# Altium PCB power_protection_board.PcbDoc
Units mm, origin at the board's own origin, x right, y up, seen from the top; angles counter-clockwise.
Board outline 16 x 10.5 mm, 2 copper layers (Top Layer, Bottom Layer); 15 components, 10 nets, 45 pads, 98 vias.
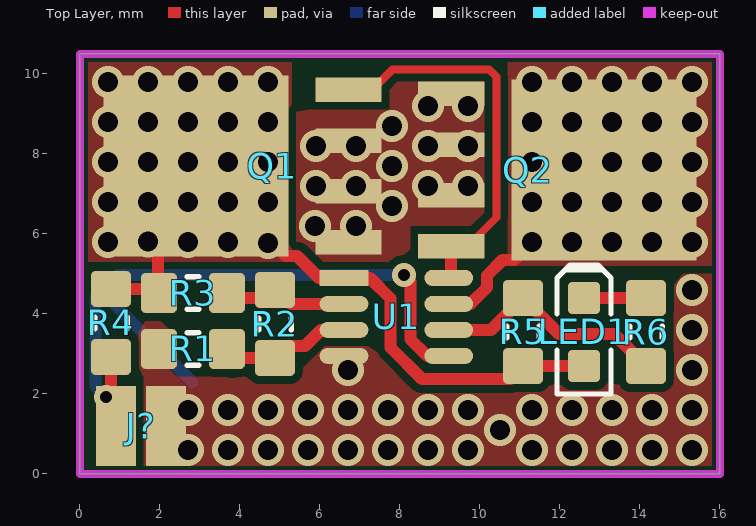
[diagram p0: Top Layer view]
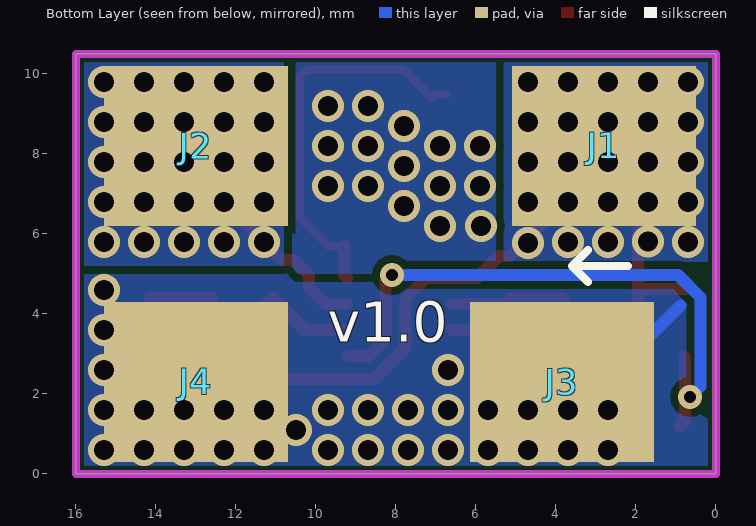
[diagram p1: Bottom Layer view, seen from below]
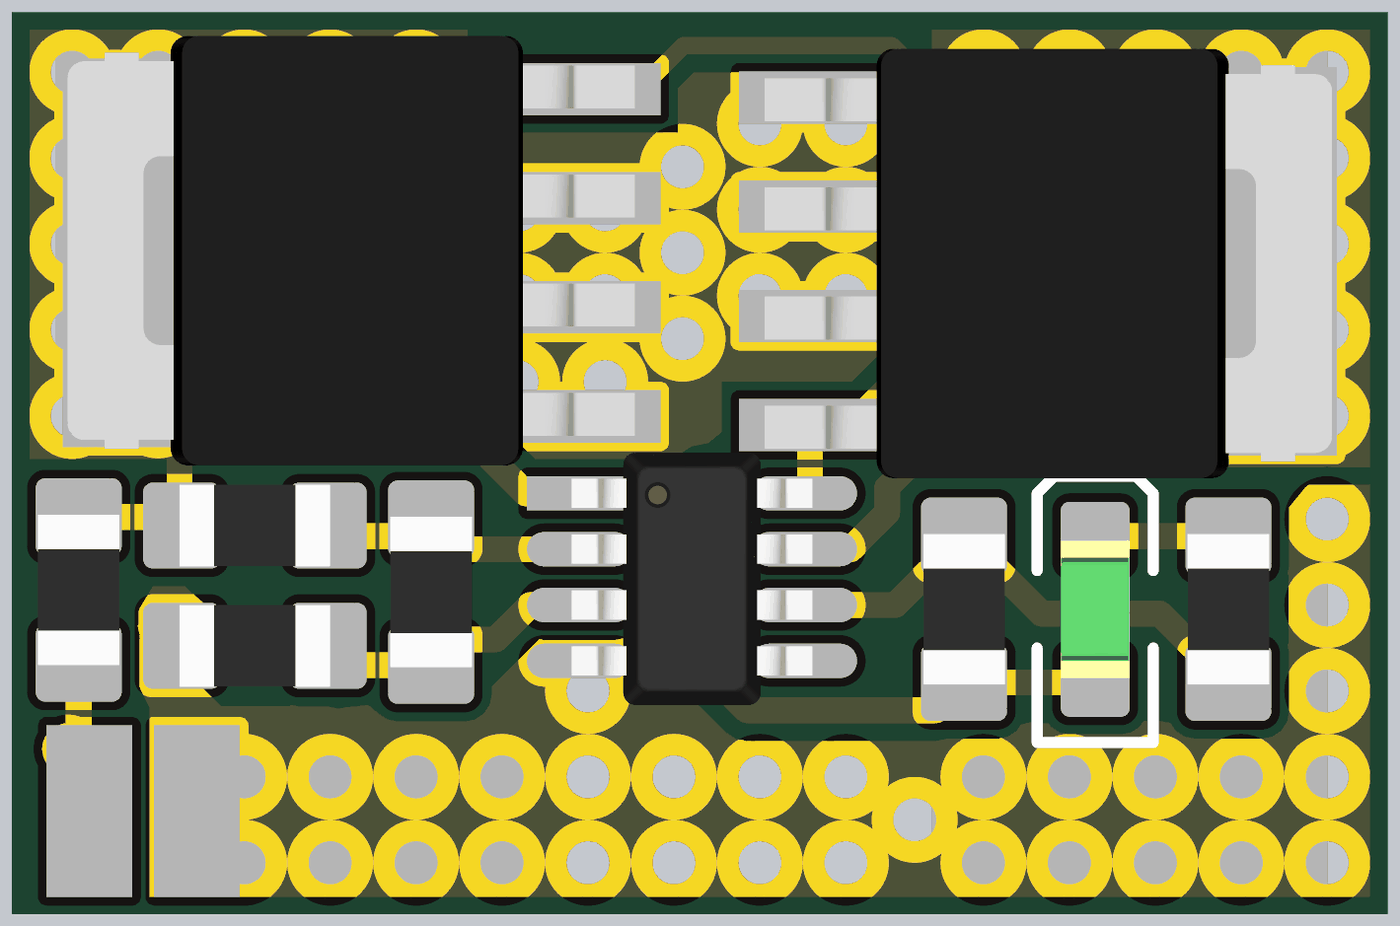
[diagram p2: 3D render of the assembled board from above, using the file's embedded part models]

## Layer stack, top to bottom
Top Solder: solder mask 0.0102, Solder Resist, Dk 3.5
Top Layer: signal copper 0.0356
Dielectric 1: dielectric 0.32, FR-4, Dk 4.8
Bottom Layer: signal copper 0.0356
Bottom Solder: solder mask 0.0102, Solder Resist, Dk 3.5

## Board outline
0,0 16,0 16,10.5 0,10.5

## Design rules (kind name [scope] priority, off if disabled: settings)
Clearance ClearanceKeepOut [All vs OnLayer('Keep-Out Layer')] p1: gap=0.1 ignorepadtopadclearanceinfootprint=FALSE
Clearance [All] p2: gap=0.2 ignorepadtopadclearanceinfootprint=FALSE
ComponentClearance [All] p1: gap=0.2 collisioncheckmode=3 verticalgap=0.2 showdistances=FALSE
PolygonConnect [All] p1: connectstyle=Direct reliefconductorwidth=0.254 reliefentries=4 polygonreliefangle="90 Angle" airgapwidth=0.254
RoomDefinition power_protection_board [InComponentClass('power_protection_board')] p1: confinementstyle=ConfineIn formatcopy=TRUE lockcomponents=FALSE outline 0,-1 52.2,-1 52.2,29.4 0,29.4
RoutingVias [All] p1: holewidth=0.5 width=1 viastyle="Through Hole" minholewidth=0.3 minwidth=0.6 maxholewidth=3 maxwidth=5
SolderMaskExpansion SolderMaskExpansionVia [IsVia And (Not IsTestpoint)] p1: expansion=-5
SolderMaskExpansion [All] p2: expansion=0.1
Width [All] p1: maxlimit=10 minlimit=0.2 preferedwidth=0.3
29 further rules are at their usual default settings.

## Components (designator, comment, footprint, x,y, rotation, side; value= is the part's Value field where it differs from the comment)
J1 "V_IN" POWER-PAD 2.8,8.2 r270 bottom
J2 "V_OUT" POWER-PAD 13,8.2 r270 bottom locked
J3 "GND_IN" POWER-PAD 3.85,2.3 r270 bottom
J4 "GND_OUT" POWER-PAD 13,2.3 r270 bottom
J? "SWITCH" PADS-2-1020 0.9,1.2 r0 top
LED1 "" LED-0603-GREEN 12.6,3.55 r90 top
Q1 "MOSFET-N" SOT669 4.068,7.7 r180 top
Q2 "MOSFET-N" SOT669 11.932,7.6 r0 top
R1 "196k" RESC1608X55N 2.825,3.125 r0 top value=1K5
R2 "105k" RESC1608X55N 4.875,3.75 r90 top value=1K5
R3 "7.5M" RESC1608X55N 2.825,4.525 r180 top value=1K5
R4 "100k" RESC1608X55N 0.775,3.775 r90 top value=1K5
R5 "10k" RESC1608X55N 11.075,3.55 r270 top value=1K5
R6 "10k" RESC1608X55N 14.15,3.55 r90 top value=1K5
U1 "LTC4365" SOT23-8 6.6,4.9 r0 top

## Footprints (in the part's own frame and the unit in brackets; to place one, negate y for a bottom-side part, rotate by r counter-clockwise, add the part's x,y. Pads: shape width x height; smd on the part's side, far side on the other; paste and mask are expansions set on the pad)
LED-0603-GREEN [mm]
  round 0.254 on Mech15: 0(0,0)
  rrect25% 0.8x0.8 smd: A(-0.85,0) K(0.85,0)
  Top Layer pour cut-out: -0.5,0.5 0.5,0.5 0.5,-0.5 -0.5,-0.5
  silkscreen extent -1.55,-0.67 1.68,0.67, body extent -0.8,-0.4 0.8,0.4, height 0.75
PADS-2-1020 [mm]
  rect 1x2 smd: 1(0,0) 2(1.25,0)
POWER-PAD [mm]
  rect 4x4.6 smd: 1(0,0)
RESC1608X55N [mm] "Chip Resistor, Body 1.6x0.8mm, EIA 0603, IPC Medium Density"
  round 0.254 on Mech15: 0(0,0)
  rrect25% 0.9x1 smd: 1(-0.85,0) 2(0.85,0)
  Top Layer pour cut-out: -0.6,0.5 -0.4,0.7 0.4,0.7 0.6,0.5 0.6,-0.5 0.4,-0.7 -0.4,-0.7 -0.6,-0.5
  silkscreen extent -0.15,-0.41 0.15,0.41, body extent -0.87,-0.47 0.88,0.48, height 0.54
SOT23-8 [mm]
  rect 1.22x0.4 smd: 1(0,0)
  oval 1.22x0.4 smd: 2(0,-0.65) 3(0,-1.3) 4(0,-1.95) 5(2.62,-1.95) 6(2.62,-1.3) 7(2.62,-0.65) 8(2.62,0)
  body extent -0.09,-2.46 2.71,0.48, height 1.2
SOT669 [mil]
  rect 182x178 smd: D(46,0)
  rect 65x24 smd: G(-104.33,-75) S(-104.33,75) S(-104.33,-25) S(-104.33,25)
  body extent -125,-99 135,97, height 43

## Part data
J1 J2 J3 J4: library part HEADER-1
J?: library part HEADER-2
LED1: library part LED_SMD_Green_0603_525nm_350mcd, "LED 0603 SMD Green 525nm 350mcd 20mA", Color=Green, Current - Test=20mA, Manufacturer 1=Kingbright, Manufacturer 2="Kingbright Company LLC", Manufacturer Part Number 1=APT1608ZGCK, Manufacturer Part Number 2=APT1608-WAP24, Package / Case="0603 (1608 metric)", Ratings="200mcd min; 350 mcd typ @ 20mA", Supplier Part Number 1=604-APT1608ZGCK, Voltage - Forward (Vf) @ 10mA=3.1V, Voltage - Forward (Vf) @ 20mA=3.3V, ComponentLink1Description=http://www.mouser.com/ds/2/216/APT1608ZGCK-262051.pdf, ComponentLink1URL=http://www.mouser.com/ds/2/216/APT1608ZGCK-262051.pdf, ComponentLink2Description="APT1608-WAP24 Datasheet", ComponentLink2URL="\\SVFI2\PBLShare\Eng\Electrical Engineering\Hardware\Altium\Libraries and Templates\Unreleased Components\Part Number Request 2013-10-02\APT1608-WAP24(Ver.1B).pdf", Lens Style/Size="Rectangle with Flat Top, 1.2mm x 0.8mm", Material=InGaN, SCDType=source, Supplier 1=Mouser, Viewing Angle=120°
R1 R2 R3 R4 R5 R6: library part RES_1K5_0603_5%, "Resistor SMD chip 1.5k Ohm 0.1W 5% 0603", Manufacturer 1=Yageo, Manufacturer Part Number 1=RC0603JR-071K5L, Package / Case="0603 (1608 metric)", Ratings="1/10 W", Supplier Part Number 1=311-1.5KGRCT-ND, Tolerance=±5%, Material="thick film", SCDType=spec, Supplier 1=Digi-Key
Q1 Q2: PROD_ID=IC-08089

## Via types
v1: diameter 0.8, hole 0.5, Top Layer to Bottom Layer, 96 vias
v2: diameter 0.6, hole 0.3, Top Layer to Bottom Layer, 2 vias

## Nets (pads, with @x,y where several pads share a name; then routed paths per layer and width w, separated by ;. In a path a pad name is that pad's centre, name@x,y a point inside that pad or via, vN(x,y) a via of type N, cw(c..) or ccw(c..) an arc to the next point about the centre after c; other vN are vias at no path point)
GATE: Q1.G Q2.G U1.8 | length 9.9
  Top Layer w0.2: Q1.G@6.718,9.505 7,9.505 7.103,9.403 7.81,10.11 10.231,10.11 10.407,9.934 10.407,6.407 9.695,5.695 Q2.G
  Top Layer w0.3: U1.8 9.282,4.962 Q2.G
GND: J3.1 J4.1 J?.2 R1.1 U1.4 | length 2.7
  Bottom Layer w0.3: 0.891,4.209 J3.1@2.8,2.3
  other v1: 2.7,0.6 3.7,0.6 4.7,0.6 5.7,0.6 6.7,0.6 7.7,0.6 8.7,0.6 9.7,0.6 11.3,0.6 12.3,0.6 13.3,0.6 14.3,0.6 15.3,0.6 10.5,1.1 2.7,1.6 3.7,1.6 4.7,1.6 5.7,1.6 6.7,1.6 7.7,1.6 8.7,1.6 9.7,1.6 11.3,1.6 12.3,1.6 13.3,1.6 14.3,1.6 15.3,1.6 6.7,2.6 15.3,2.6 15.3,3.6 15.3,4.6
NetLED1_K: LED1.K R6.2 | length 1.6
  Top Layer w0.3: LED1.K R6.2
NetQ1_S: Q1.S Q2.S
  other v1: 5.875,6.2 6.9,6.2 7.8,6.7 5.9,7.2 6.9,7.2 8.7,7.2 9.7,7.2 7.8,7.7 5.9,8.2 6.9,8.2 8.7,8.2 9.7,8.2 7.8,8.7 8.7,9.2 9.7,9.2
nFAULT: R5.1 R6.1 U1.6 | length 6
  Top Layer w0.3: U1.6 10.275,3.6 R5.1 11.975,3.5 13.35,3.5 R6.1
OV: R1.2 R2.1 U1.3 | length 3.3
  Top Layer w0.3: R1.2 3.9,2.9 R2.1 5.175,3.2 5.625,3.2 6.025,3.6 U1.3
SHDN: J?.1 R4.1 U1.5 | length 15.1
  Top Layer w0.3: R4.1 0.775,1.325 J?.1 ; v2(8.1,4.975) 8.26,4.816 8.26,3.372 8.682,2.95 U1.5
  Bottom Layer w0.3: v2(0.65,1.925) 0.391,2.184 0.391,4.416 0.95,4.975 v2(8.1,4.975)
UV: R2.2 R3.1 U1.2 | length 2.9
  Top Layer w0.3: R3.1@3.8,4.35 3.85,4.4 5.125,4.4 5.275,4.25 U1.2
VIN: J1.1 LED1.A Q1.D R3.2 R4.2 R5.2 U1.1 | length 17.9
  Top Layer w0.3: R4.2 1.875,4.625 R3.2@1.95,4.55 ; R3.2@1.95,4.196 R3.2@1.95,4.55 ; R3.2 R3.2@1.95,4.55 ; LED1.A R5.2 10.75,2.375 8.55,2.375 7.76,3.165 7.76,4.39 7.25,4.9 U1.1 5.975,4.9 5.425,5.45 5.15,5.45 Q1.D 1.95,6.75 R3.2@1.95,4.55
  other v1: 4.7,5.78 0.7,5.8 1.7,5.807 2.7,5.8 3.7,5.8 0.7,6.8 1.7,6.8 2.7,6.8 3.7,6.8 4.7,6.8 0.7,7.8 1.7,7.8 2.7,7.8 3.7,7.8 4.7,7.8 0.7,8.8 1.7,8.8 2.7,8.8 3.7,8.8 4.7,8.8 0.7,9.8 1.7,9.8 2.7,9.8 3.7,9.8 4.7,9.8
VOUT: J2.1 Q2.D U1.7 | length 5.4
  Top Layer w0.3: U1.7 9.758,4.25 10.18,4.672 10.18,4.968 10.562,5.35 10.85,5.35 Q2.D
  other v1: 11.3,5.8 12.3,5.8 13.3,5.8 14.3,5.8 15.3,5.8 11.3,6.8 12.3,6.8 13.3,6.8 14.3,6.8 15.3,6.8 11.3,7.8 12.3,7.8 13.3,7.8 14.3,7.8 15.3,7.8 11.3,8.8 12.3,8.8 13.3,8.8 14.3,8.8 15.3,8.8 11.3,9.8 12.3,9.8 13.3,9.8 14.3,9.8 15.3,9.8
pads on no net: LED1.0 R1.0 R2.0 R3.0 R4.0 R5.0 R6.0

## Polygon pours and split planes (outlines as drawn)
GND on Top Layer "GND_L01_P008" (solid, remove dead copper, pour order 8): 0.2,0 0.2,5 16,5 16,0
NetQ1_S on Top Layer "NETQ1_S_L01_P012" (solid, remove dead copper, pour order 12): 10.7,9.8 10.7,5 5.3,5 5.3,9.8
VOUT on Top Layer "Top Layer-VOUT" (solid, pour order 16): 16,5.2 10.7,5.2 10.7,10.5 16,10.5
VIN on Top Layer "Top Layer-VIN" (solid, pour order 14): 0,5.3 0,10.5 5.3,10.5 5.3,5.3
GND on Bottom Layer "GND_L02_P006" (solid, remove dead copper, pour order 6): 0.2,0 16,0 16,5 0.2,5
NetQ1_S on Bottom Layer "NETQ1_S_L02_P000" (solid, remove dead copper, pour order 4): 5.3,10.5 10.8,10.5 10.8,5 5.3,5
VOUT on Bottom Layer "VOUT_L02_P004" (solid, remove dead copper, pour order 0): 10.8,5.2 16,5.2 16,10.5 10.8,10.5
VIN on Bottom Layer "VIN_L02_P002" (solid, remove dead copper, pour order 2): 0,5.3 0,10.5 5.3,10.5 5.3,5.3

## Keep-outs
Keep-Out Layer:
  the board outline again, w0.2

## Silkscreen, mask and mechanical layers (free items; w line width, h text height)
Bottom Overlay:
  lines w0.2: 2.2,5.2 3.6,5.2 ; 3.2,4.8 3.6,5.2 ; 3.2,5.6 3.6,5.2
  text "v1.0" at 9.7,3.3 h1